# Altium PCB 十二进十二出 .PcbDoc (part 1 of 3)
Units mil, origin at the board's own origin, x right, y up, seen from the top; angles counter-clockwise.
Board outline 4818.9 x 3440.94 mil, 2 copper layers (Top Layer, Bottom Layer); 184 components, 190 nets, 626 pads, 130 vias.
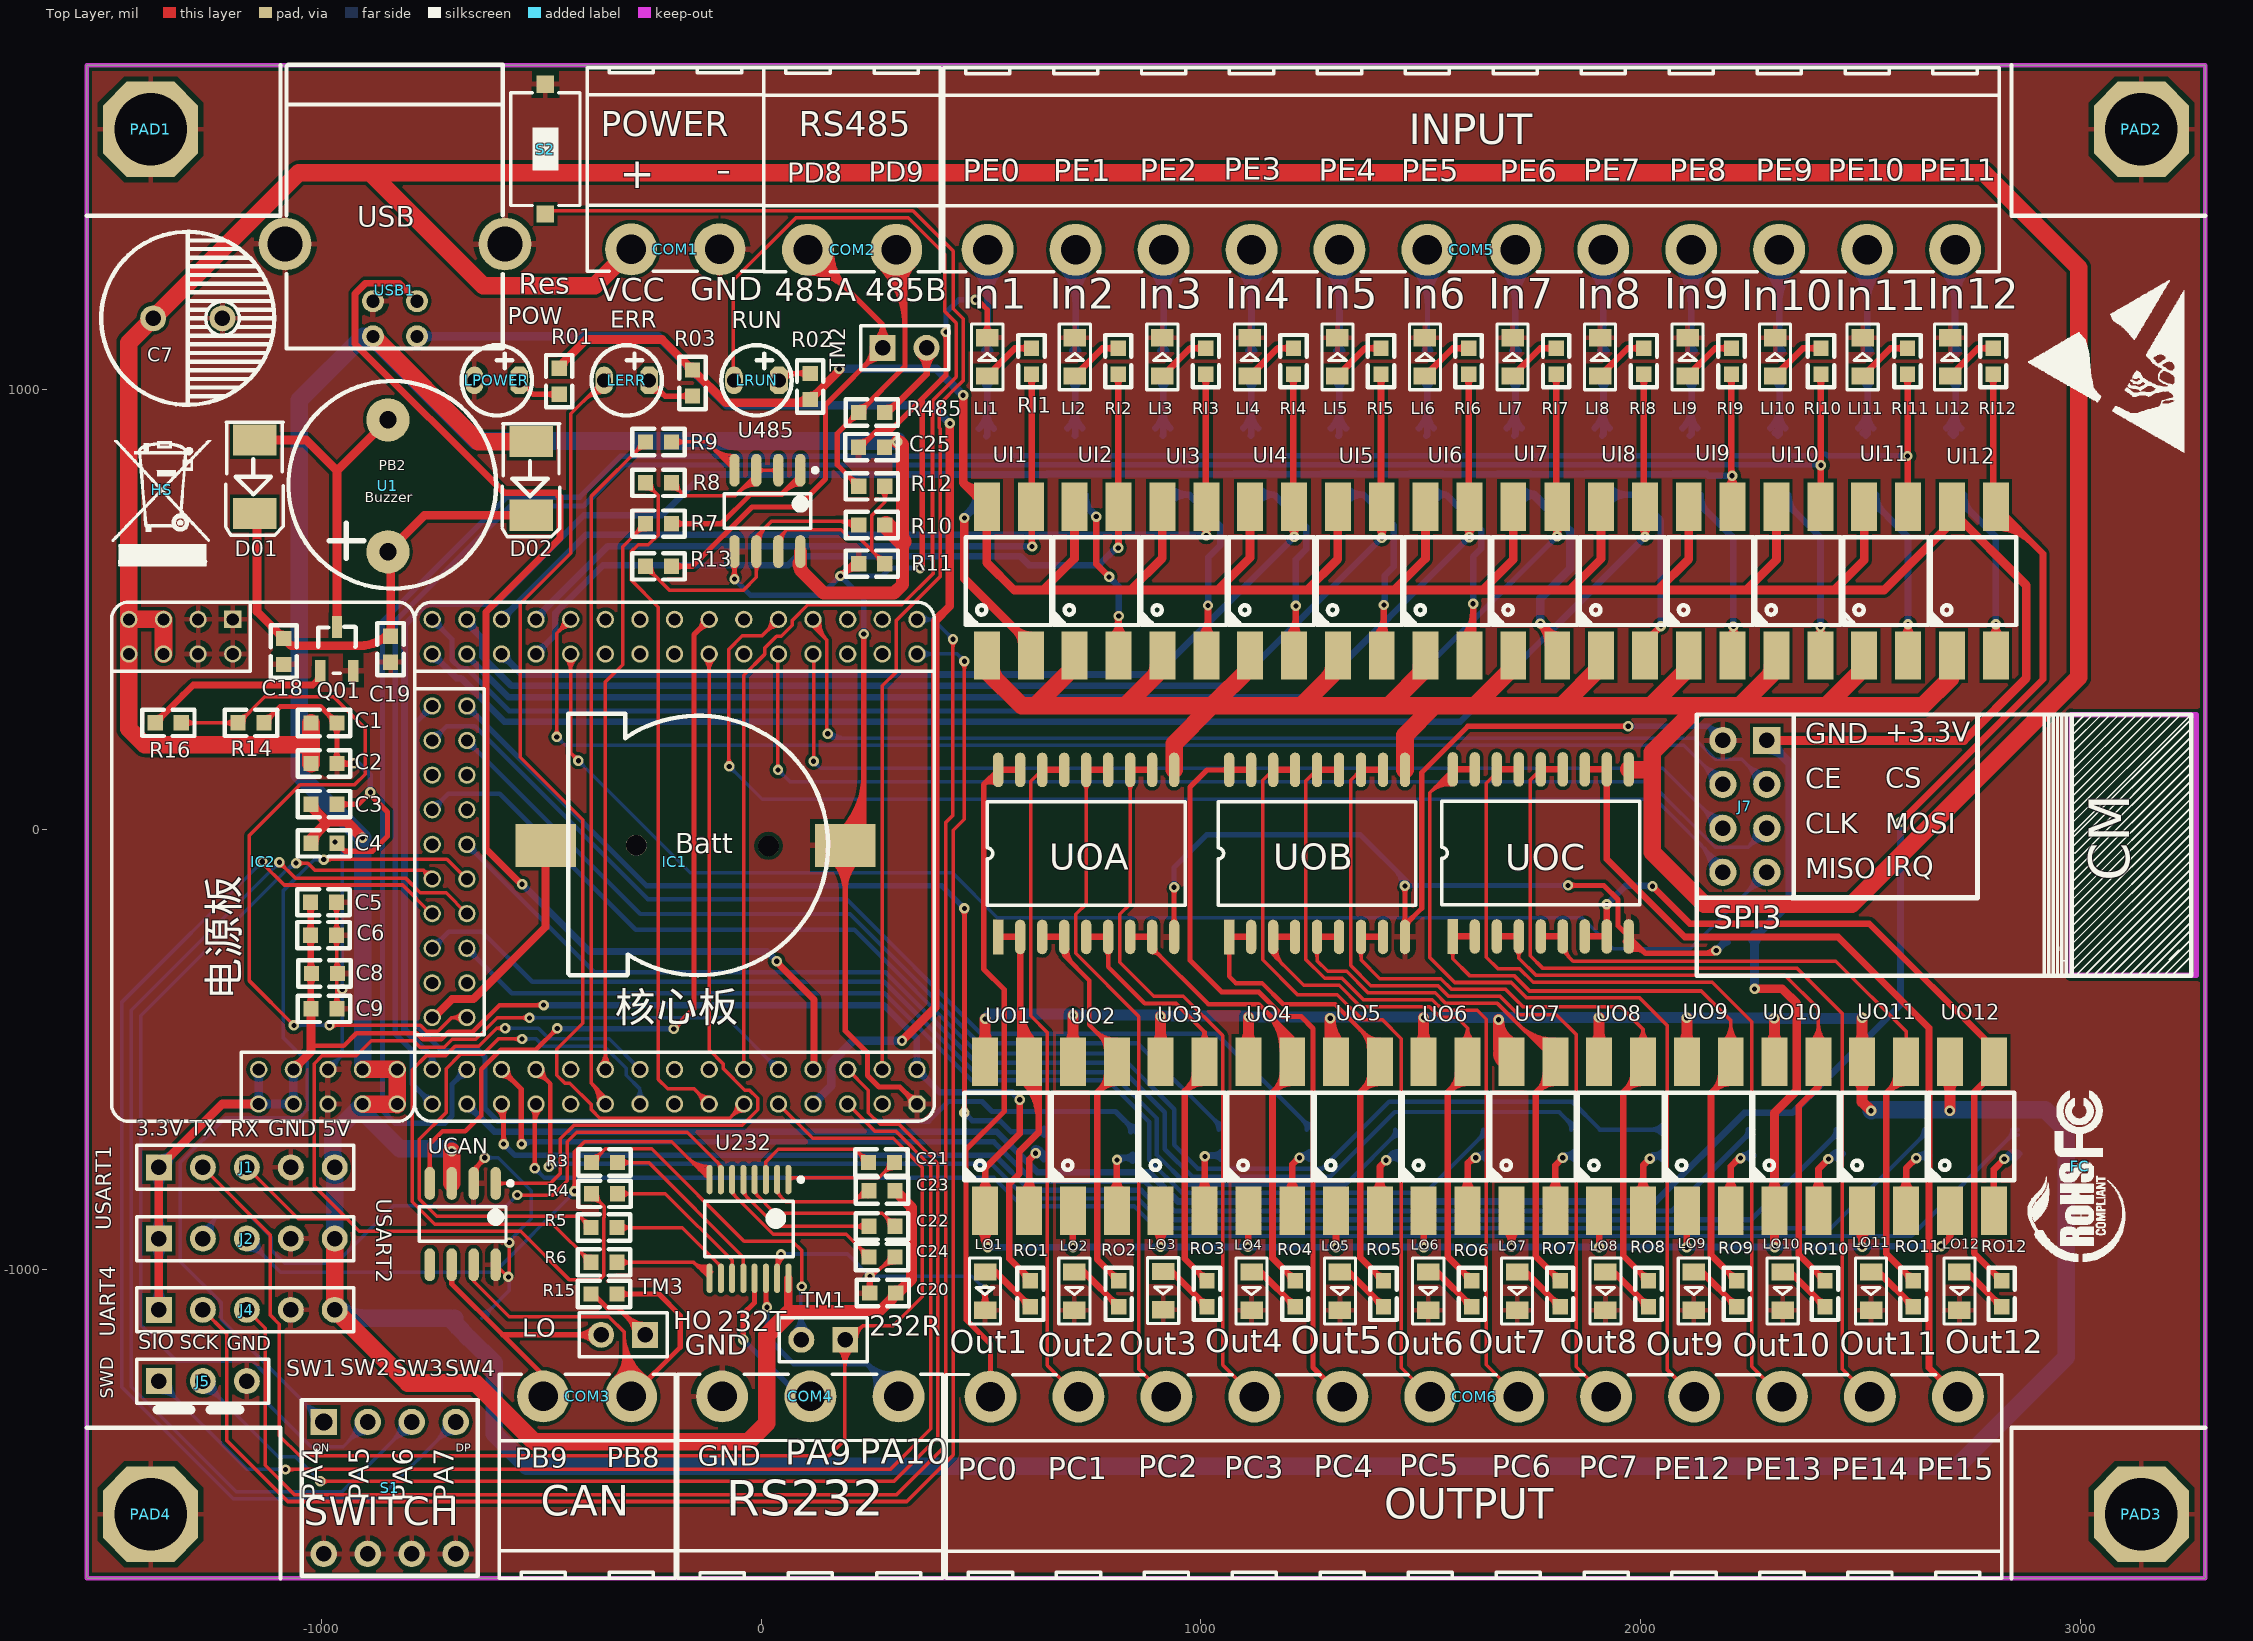
[diagram p0: Top Layer view]
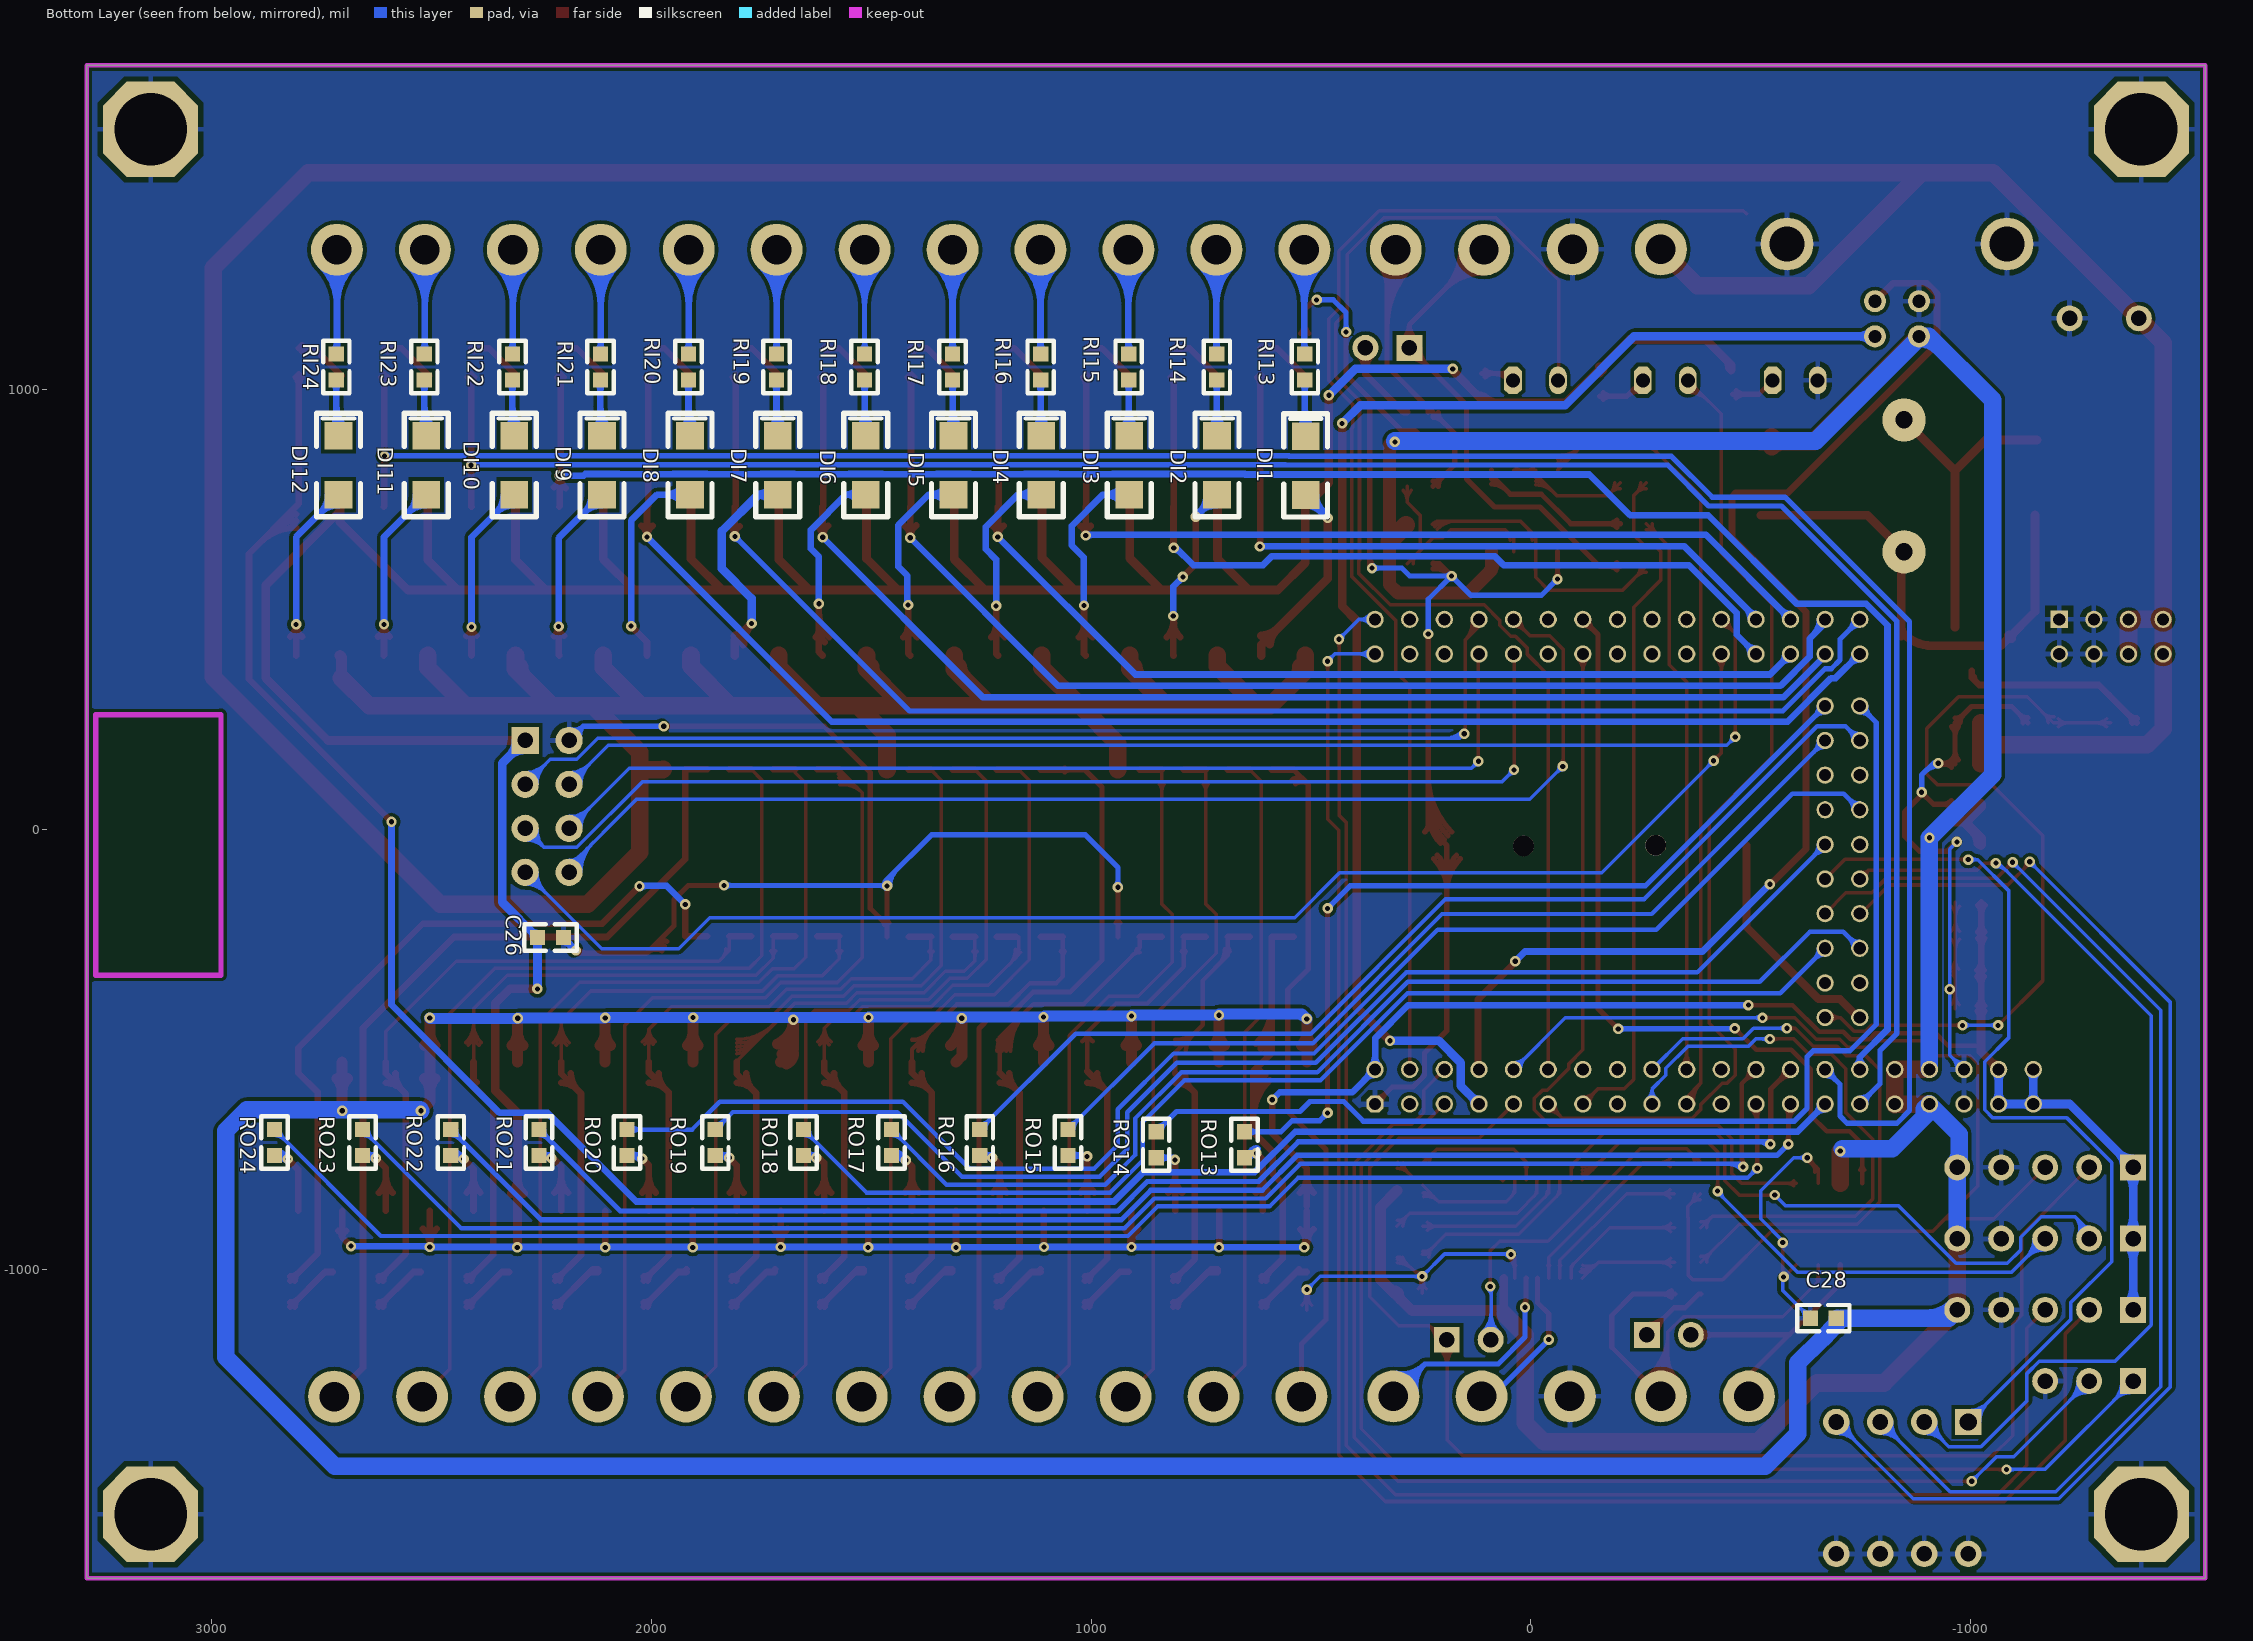
[diagram p1: Bottom Layer view, seen from below]

## Layer stack, top to bottom
Top Layer: signal copper 1.4
Dielectric: dielectric 12.6, FR-4, Dk 4.8
Bottom Layer: signal copper 1.4

## Board outline
-1534.3,-1702.68 3284.59,-1702.68 3284.59,1738.26 -1534.3,1738.26

## Design rules (kind name [scope] priority, off if disabled: settings)
Clearance [(InPadClass('All Pads')) vs InPolygon] p1: gap=8
Clearance Clearance_1 [All] p2: gap=7.87
ComponentClearance [All] p1 off: gap=10 collisioncheckmode=3 verticalgap=10 showdistances=FALSE
DiffPairsRouting [All] p1: maxlimit=12 minlimit=8 mostfreqgap=10 maxuncoupledlength=500
PlaneConnect [All] p1: planeconnectstyle=Relief reliefexpansion=0 reliefentries=4 reliefconductorwidth=11.81 reliefairgap=20
PolygonConnect PolygonConnect_1 [All vs IsComponentPad] p1: connectstyle=Relief reliefconductorwidth=11.81 reliefentries=4 polygonreliefangle="90 Angle" airgapwidth=11.81
PolygonConnect [All] p2: connectstyle=Direct reliefconductorwidth=11.81 reliefentries=4 polygonreliefangle="90 Angle" airgapwidth=11.81
RoomDefinition "公共电路 -（十二专用）" [InComponentClass('公共电路 -（十二专用） ')] p1: confinementstyle=ConfineIn formatcopy=TRUE lockcomponents=FALSE outline -1536.41,-1749.21 398.59,-1749.21 398.59,1761.79 -1536.41,1761.79
RoomDefinition 十二进十二出 [InComponentClass('十二进十二出')] p2: confinementstyle=ConfineIn formatcopy=TRUE lockcomponents=FALSE outline 3355.46,1820.94 402.7,1820.94 402.7,-1773.55 3355.46,-1773.55
RoutingVias [All] p1: holewidth=11.81 width=23.62 viastyle="Through Hole" minholewidth=11.81 minwidth=23.62 maxholewidth=11.81 maxwidth=23.62
SolderMaskExpansion [All] p1: expansion=4
Width [All] p1: maxlimit=78.74 minlimit=8 preferedwidth=50 minimp=50.000000 maximp=50.000000 favimp=50.000000
25 further rules are at their usual default settings.

## Classes and differential pairs
component class "公共电路 -（十二专用）": Batt C1 C2 C3 C4 C5 C6 C7 C8 C9 C18 C19 C20 C21 C22 C23 C24 C25 C26 C28 COM1 COM2 COM3 COM4 D01 D02 FC HS IC1 J1 J2 J4 J5 J7 LERR LPOWER LRUN PAD1 PAD2 PAD3 PAD4 Q01 R01 R02 R3 R03 R4 R5 R6 R7 R8 R9 R10 R11 R12 R13 R14 R15 R16 R485 S1 S2 TM1 TM2 TM3 U1 U232 U485 UCAN usb1
component class 十二进十二出: COM5 COM6 DI1 DI2 DI3 DI4 DI5 DI6 DI7 DI8 DI9 DI10 DI11 DI12 LI1 LI2 LI3 LI4 LI5 LI6 LI7 LI8 LI9 LI10 LI11 LI12 LO1 LO2 LO3 LO4 LO5 LO6 LO7 LO8 LO9 LO10 LO11 LO12 RI1 RI2 RI3 RI4 RI5 RI6 RI7 RI8 RI9 RI10 RI11 RI12 RI13 RI14 RI15 RI16 RI17 RI18 RI19 RI20 RI21 RI22 RI23 RI24 RO1 RO2 RO3 RO4 RO5 RO6 RO7 RO8 RO9 RO10 RO11 RO12 RO13 RO14 RO15 RO16 RO17 RO18 RO19 RO20 RO21 RO22 RO23 RO24 UI1 UI2 UI3 UI4 UI5 UI6 UI7 UI8 UI9 UI10 UI11 UI12 UO1 UO2 UO3 UO4 UO5 UO6 UO7 UO8 UO9 UO10 UO11 UO12 UOA UOB UOC

## Components (designator, comment, footprint, x,y, rotation, side; value= is the part's Value field where it differs from the comment)
Batt "电源底座" MINI-BAT -489.85,-36.21 r0 top (schematic designator BATT1)
C1 "104" 0603A -1023.91,242.36 r0 top
C2 "104" 0603A -1023.91,150.07 r0 top
C3 "104" 0603A -1023.91,57.79 r0 top
C4 "104" 0603A -1023.91,-31.07 r0 top
C5 "104" 0603A -1024.85,-165.21 r0 top
C6 "104" 0603A -1024.74,-240.21 r0 top
C7 "470UF/50V" 电解电容10mm -1382.85,1162.79 r270 top
C8 "104" 0603A -1022.85,-327.21 r0 top
C9 "104" 0603A -1023.91,-407.64 r0 top
C18 "104" 0603A -1085.85,434.79 r270 top
C19 "104" 0603A -842.85,439.79 r270 top
C20 "104" 0603A 306.15,-1054.21 r180 top
C21 "104" 0603A 303.15,-757.21 r180 top
C22 "104" 0603A 245.15,-902.21 r0 top
C23 "104" 0603A 245.15,-821.21 r0 top
C24 "104" 0603A 245.15,-972.21 r0 top
C25 "104" 0603A 221.15,869.79 r0 top
C26 "104" 0603A 2200.15,-245.21 r0 bottom
C28 "104" 0603A -635.85,-1111.21 r180 bottom locked
COM1 "POW" CON2-5.1卧#1 -94.85,1319.79 r0 top (schematic designator J1)
COM2 "RS485" CON2-5.1卧#1 307.15,1318.79 r0 top (schematic designator J4)
COM3 "CAN" CON2-5.1卧#2 -495.85,-1289.21 r180 top
COM4 "RS232" CON3-5.1卧 -89,-1289 r180 top (schematic designator RS232)
COM5 "INPUT" CON12-5.1卧上 2715.15,1318.79 r0 top
COM6 "OUTPUT" CON12-5.1卧下 1723.15,-1490.21 r0 top
D01 "RB521S" 贴片二极管 -1154.85,667.79 r270 top
D02 "RB521S" 贴片二极管 -525.85,663.79 r270 top
DI1 "4148" 1206C 512.15,760.79 r90 bottom
DI2 "4148" 1206C 713.51,761.79 r90 bottom
DI3 "4148" 1206C 913.33,761.79 r90 bottom
DI4 "4148" 1206C 1113.15,761.79 r90 bottom
DI5 "4148" 1206C 1312.96,761.79 r90 bottom
DI6 "4148" 1206C 1512.78,761.79 r90 bottom
DI7 "4148" 1206C 1712.6,761.79 r90 bottom
DI8 "4148" 1206C 1912.42,761.79 r90 bottom
DI9 "4148" 1206C 2112.24,761.79 r90 bottom
DI10 "4148" 1206C 2312.05,761.79 r90 bottom
DI11 "4148" 1206C 2511.87,761.79 r90 bottom
DI12 "4148" 1206C 2711.69,761.79 r90 bottom
FC "" fc 2999.15,-765.21 r90 top
HS "" HS -1363.85,772.79 r0 top
IC1 "Core Board" 核心板-物联网1 354.15,-624.21 r0 top
IC2 "SPOW" 电源板 -827.85,-624.21 r270 top
J1 "USART1" 2.54排针1*5 -1369.85,-668.21 r0 top
J2 "USART2" 2.54排针1*5 -1369.85,-830.21 r0 top
J4 "UART4" 2.54排针1*5 -1369.85,-992.21 r0 top
J5 "SWD" 2.54排针1*3 -1369.85,-1154.21 r0 top
J7 "NRF2401模块" NRF24L01 2187.15,202.79 r180 top
LERR "ERR" LED2.5 -305.96,1021.72 r0 top
LI1 "LED" SMDLED 514.15,1031.79 r90 top
LI2 "LED" SMDLED 713.24,1031.79 r90 top
LI3 "LED" SMDLED 912.33,1031.79 r90 top
LI4 "LED" SMDLED 1111.42,1031.79 r90 top
LI5 "LED" SMDLED 1310.51,1031.79 r90 top
LI6 "LED" SMDLED 1509.6,1031.79 r90 top
LI7 "LED" SMDLED 1708.69,1031.79 r90 top
LI8 "LED" SMDLED 1907.78,1031.79 r90 top
LI9 "LED" SMDLED 2106.87,1031.79 r90 top
LI10 "LED" SMDLED 2305.96,1031.79 r90 top
LI11 "LED" SMDLED 2505.05,1031.79 r90 top
LI12 "LED" SMDLED 2704.15,1031.79 r90 top
LO1 "LED" SMDLED 509.15,-1006.21 r270 top
LO2 "LED" SMDLED 712.15,-1006.21 r270 top
LO3 "LED" SMDLED 914.15,-1005.21 r270 top
LO4 "LED" SMDLED 1115.15,-1006.21 r270 top
LO5 "LED" SMDLED 1316.15,-1006.21 r270 top
LO6 "LED" SMDLED 1517.15,-1006.21 r270 top
LO7 "LED" SMDLED 1719.15,-1006.21 r270 top
LO8 "LED" SMDLED 1920.15,-1006.21 r270 top
LO9 "LED" SMDLED 2121.15,-1006.21 r270 top
LO10 "LED" SMDLED 2323.15,-1006.21 r270 top
LO11 "LED" SMDLED 2524.15,-1006.21 r270 top
LO12 "LED" SMDLED 2725.15,-1006.21 r270 top
LPOWER "PLED" LED2.5 -601.23,1021.72 r0 top
LRUN "RUN" LED2.5 -10.68,1021.72 r0 top
PAD1 "PAD" PAD -1388.63,1592.59 r0 top
PAD2 "PAD" PAD 3138.93,1592.59 r0 top
PAD3 "PAD" PAD 3138.93,-1557.02 r0 top
PAD4 "PAD" PAD -1388.63,-1557.02 r0 top
Q01 "9013" SOT23 -1002.85,360.79 r0 top
R01 "300R" 0603A -459.5,1049.28 r270 top
R02 "300R" 0603A 111.37,978.42 r90 top
R03 "300R" 0603A -156.35,1045.35 r270 top
R3 "33R" 0603A -385.85,-757.21 r0 top
R4 "33R" 0603A -385.85,-828.21 r0 top
R5 "33R" 0603A -386.85,-905.21 r0 top
R6 "33R" 0603A -386.85,-984.21 r0 top
R7 "33R" 0603A -262.91,695.79 r0 top
R8 "33R" 0603A -262.91,788.79 r0 top
R9 "33R" 0603A -262.91,881.79 r0 top
R10 "100K" 0603A 222.09,692.79 r0 top
R11 "100K" 0603A 281.15,604.79 r180 top
R12 "33R" 0603A 281.15,780.79 r180 top
R13 "33R" 0603A -262.91,598.79 r0 top
R14 "10K" 0603A -1130.85,242.79 r180 top
R15 "120R" 0603A -386.85,-1056.21 r0 top
R16 "1K" 0603A -1318.85,242.79 r180 top
R485 "120R" 0603A 281.15,948.79 r180 top
RI1 "270R" 0603A 615.03,1035.73 r90 top
RI2 "270R" 0603A 812.03,1035.73 r90 top
RI3 "270R" 0603A 1011.26,1035.73 r90 top
RI4 "270R" 0603A 1210.48,1035.73 r90 top
RI5 "270R" 0603A 1409.7,1035.73 r90 top
RI6 "270R" 0603A 1608.92,1035.73 r90 top
RI7 "270R" 0603A 1808.15,1035.73 r90 top
RI8 "270R" 0603A 2007.37,1035.73 r90 top
RI9 "270R" 0603A 2206.59,1035.73 r90 top
RI10 "270R" 0603A 2410.15,1035.79 r90 top
RI11 "270R" 0603A 2607.15,1035.79 r90 top
RI12 "270R" 0603A 2802.03,1035.73 r90 top
RI13 "2K4R" 0603A 513.94,1022.73 r90 bottom
RI14 "2K4R" 0603A 714.19,1022.73 r90 bottom
RI15 "2K4R" 0603A 914.44,1022.73 r90 bottom
RI16 "2K4R" 0603A 1114.69,1022.73 r90 bottom
RI17 "2K4R" 0603A 1314.94,1022.73 r90 bottom
RI18 "2K4R" 0603A 1515.19,1022.73 r90 bottom
RI19 "2K4R" 0603A 1715.44,1022.73 r90 bottom
RI20 "2K4R" 0603A 1915.69,1022.73 r90 bottom
RI21 "2K4R" 0603A 2115.94,1022.73 r90 bottom
RI22 "2K4R" 0603A 2316.19,1022.73 r90 bottom
RI23 "2K4R" 0603A 2516.44,1022.73 r90 bottom
RI24 "2K4R" 0603A 2716.69,1022.73 r90 bottom
RO1 "270R" 0603A 612.15,-1026.21 r270 top
RO2 "270R" 0603A 812.96,-1026.21 r270 top
RO3 "270R" 0603A 1013.78,-1026.21 r270 top
RO4 "270R" 0603A 1214.6,-1026.21 r270 top
RO5 "270R" 0603A 1415.42,-1026.21 r270 top
RO6 "270R" 0603A 1616.24,-1026.21 r270 top
RO7 "270R" 0603A 1817.05,-1026.21 r270 top
RO8 "270R" 0603A 2017.87,-1026.21 r270 top
RO9 "270R" 0603A 2218.69,-1026.21 r270 top
RO10 "270R" 0603A 2419.51,-1026.21 r270 top
RO11 "270R" 0603A 2620.33,-1026.21 r270 top
RO12 "270R" 0603A 2821.14,-1026.21 r270 top
RO13 "51R" 0603A 651.42,-687.21 r270 bottom
RO14 "51R" 0603A 851.96,-687.21 r270 bottom
RO15 "51R" 0603A 1052.51,-682.21 r270 bottom
RO16 "51R" 0603A 1253.06,-682.21 r270 bottom
RO17 "51R" 0603A 1454.15,-682.21 r270 bottom
RO18 "51R" 0603A 1654.15,-682.21 r270 bottom
RO19 "51R" 0603A 1854.69,-682.21 r270 bottom
RO20 "51R" 0603A 2055.24,-682.21 r270 bottom
RO21 "51R" 0603A 2255.78,-682.21 r270 bottom
RO22 "51R" 0603A 2456.33,-682.21 r270 bottom
RO23 "51R" 0603A 2656.87,-682.21 r270 bottom
RO24 "51R" 0603A 2857.42,-682.21 r270 bottom
S1 "拨码开关*4" SWITCH*4 -844.85,-1497.21 r0 top
S2 "RESRT" SW-PB2 -490.85,1547.79 r90 top
TM1 "232跳帽" 2.54排针1*2 191.15,-1260.21 r180 top
TM2 "485跳帽" 2.54排针1*2 276.15,1195.79 r0 top
TM3 "CAN跳帽" 2.54排针1*2 -264,-1249 r180 top
U1 "Buzzer" 蜂鸣器 -848.85,781.79 r270 top (schematic designator U3)
U232 "SP3232" TSSOP16 -27.85,-908.21 r270 top
U485 "SP485" SO8_L 14.15,724.79 r270 top
UCAN "TJA1050" SO8_L -678.85,-897.21 r270 top
UI1 "PC817" PC817 513.15,407.79 r90 top
UI2 "PC817" PC817 712.69,407.79 r90 top
UI3 "PC817" PC817 912.24,407.79 r90 top
UI4 "PC817" PC817 1111.78,407.79 r90 top
UI5 "PC817" PC817 1311.33,407.79 r90 top
UI6 "PC817" PC817 1510.87,407.79 r90 top
UI7 "PC817" PC817 1710.42,407.79 r90 top
UI8 "PC817" PC817 1909.96,407.79 r90 top
UI9 "PC817" PC817 2109.51,407.79 r90 top
UI10 "PC817" PC817 2309.05,407.79 r90 top
UI11 "PC817" PC817 2508.6,407.79 r90 top
UI12 "PC817" PC817 2708.15,407.79 r90 top
UO1 "PC817" PC817 509.42,-855.21 r90 top
UO2 "PC817" PC817 708.87,-855.21 r90 top
UO3 "PC817" PC817 908.33,-855.21 r90 top
UO4 "PC817" PC817 1107.78,-855.21 r90 top
UO5 "PC817" PC817 1307.24,-855.21 r90 top
UO6 "PC817" PC817 1506.69,-855.21 r90 top
UO7 "PC817" PC817 1706.15,-855.21 r90 top
UO8 "PC817" PC817 1905.6,-855.21 r90 top
UO9 "PC817" PC817 2105.05,-855.21 r90 top
UO10 "PC817" PC817 2304.51,-855.21 r90 top
UO11 "PC817" PC817 2503.96,-855.21 r90 top
UO12 "PC817" PC817 2703.42,-855.21 r90 top
UOA "ULN2803" sol18 539,-244.13 r90 top
UOB "ULN2803" sol18 1064.15,-244.13 r90 top
UOC "ULN2803" sol18 1573,-243 r90 top
USB1 "USB" USB-B3 -882.85,1121.79 r90 top

## Footprints (in the part's own frame and the unit in brackets; to place one, negate y for a bottom-side part, rotate by r counter-clockwise, add the part's x,y. Pads: shape width x height; smd on the part's side, far side on the other; paste and mask are expansions set on the pad)
2.54排针1*2 [mm]
  rect 1.5x1.5 hole 0.9: 1(0,-2.54)
  round 1.5 hole 0.9: 2(2.54,-2.54)
  silkscreen extent -1.27,-3.81 3.81,-1.27
2.54排针1*3 [mm]
  rect 1.5x1.5 hole 0.9: 1(0,-2.54)
  round 1.5 hole 0.9: 2(2.54,-2.54) 3(5.08,-2.54)
  silkscreen extent -1.27,-3.81 6.35,-1.27
2.54排针1*5 [mm]
  rect 1.5x1.5 hole 0.9: 1(0,-2.54)
  round 1.5 hole 0.9: 2(2.54,-2.54) 3(5.08,-2.54) 4(7.62,-2.54) 5(10.16,-2.54)
  silkscreen extent -1.27,-3.81 11.25,-1.27
0603A [mm]
  rect 0.88x0.88 smd: 1(0,0) 2(1.5,0)
  silkscreen extent -0.76,-0.76 2.26,0.76, body extent 0,-0.54 1.5,0.54, height 1.45
1206C [mm]
  rect 1.6x1.6 smd: A(0,0) K(3.4,0)
  silkscreen extent -1.27,-1.27 4.7,1.27, body extent 0,-1.42 3.4,1.42, height 2
CON2-5.1卧#1 [mm]
  round 3 hole 1.7: 1(0,0) 2(-5.1,0)
  silkscreen extent -7.65,-1.28 2.55,10.5
CON2-5.1卧#2 [mm]
  round 3 hole 1.7: 1(0,0) 2(-5.08,0)
  silkscreen extent -7.62,-1.28 2.53,10.5
CON3-5.1卧 [mm]
  round 3 hole 1.7: 1(0,0) 2(-5.1,0) 3(-10.2,0)
  silkscreen extent -12.75,-1.28 2.55,10.5
CON12-5.1卧上 [mm]
  round 3 hole 1.7: 1(-55.88,0) 2(-50.8,0) 3(-45.72,0) 4(-40.64,0) 5(-35.56,0) 6(-30.48,0) 7(-25.4,0) 8(-20.32,0) 9(-15.24,0) 10(-10.16,0) 11(-5.08,0) 12(0,0)
  silkscreen extent -58.42,-1.28 2.55,10.5
CON12-5.1卧下 [mm]
  round 3 hole 1.7: 1(-30.52,5.1) 2(-25.44,5.1) 3(-20.36,5.1) 4(-15.28,5.1) 5(-10.2,5.1) 6(-5.12,5.1) 7(-0.04,5.1) 8(5.04,5.1) 9(10.12,5.1) 10(15.2,5.1) 11(20.28,5.1) 12(25.36,5.1)
  silkscreen extent -33.07,-5.4 27.9,6.38
fc [mil]
  silkscreen extent -218,-103 172,118
HS [mil]
  silkscreen extent -113,-173 113,113
LED2.5 [mil]
  oct 40x63 hole 32: A(51.18,0)
  oval 40x63 hole 32: K(-51.18,0)
  silkscreen extent -80,-80 80,80
MINI-BAT [mm]
  round 1.2 hole 1.2: 0(5.226,0.017) 0(12.863,-0.02)
  rect 3.5x2.5 smd: 1(-0.01,0.007) 2(17.29,0.007)
  silkscreen extent 1.29,-7.49 16.31,7.61
NRF24L01 [mil]
  round 62 hole 35: 1(0,0) 3(0,100) 4(-100,100) 5(0,200) 6(-100,200) 7(0,300) 8(-100,300)
  rect 62x62 hole 35: 2(-100,0)
  silkscreen extent -1065,-59 59,535
PAD [mm]
  oct 5.5x5.5 hole 4.2: 1(0,0)
PC817 [mm]
  rect 2.8x1.5 smd: 1(-0.3,0) 2(-0.3,-2.54) 3(8.3,-2.54) 4(8.3,0)
  silkscreen extent 1.46,-3.72 6.53,1.22
SMDLED [mm]
  rect 1x1.3 smd: A(0,0) K(2.2,0)
  silkscreen extent -0.8,-0.9 3,0.9, body extent 0,-0.99 2.2,0.99, height 1.5
SO8_L [mm] "SOIC, 8-Leads, Body 4.9x3.9mm, Pitch 1.27mm, IPC High Density"
  oval 1.9x0.6 smd: 1(-2.35,1.905) 2(-2.35,0.635) 3(-2.35,-0.635) 4(-2.35,-1.905) 5(2.35,-1.905) 6(2.35,-0.635) 7(2.35,0.635) 8(2.35,1.905)
  silkscreen extent -2.47,-2.5 1,2.88, body extent -2,-2.5 2,2.5, height 1.75
sol18 [mm]
  rect 2x0.6 smd: 1(0,0)
  oval 2x0.6 smd: 2(0,-1.27) 3(0,-2.54) 4(0,-3.81) 5(0,-5.08) 6(0,-6.35) 7(0,-7.62) 8(0,-8.89) 9(0,-10.16) 10(9.65,-10.16) 11(9.65,-8.89) 12(9.65,-7.62) 13(9.65,-6.35) 14(9.65,-5.08) 15(9.65,-3.81) 16(9.65,-2.54) 17(9.65,-1.27) 18(9.65,0)
  silkscreen extent 1.84,-10.79 7.82,0.64
SOT23 [mm]
  rect 0.6x1.27 smd: 1(0,0) 2(1.905,0) 3(0.965,2.54)
  silkscreen extent -0.11,-0.13 2.04,2.56, body extent -0.5,0.43 2.42,2.15, height 1.5
SW-PB2 [mm]
  rect 1x1 smd: 1(-3.75,0) 2(3.75,0)
  silkscreen extent -3.25,-2 3.25,2
SWITCH*4 [mil]
  rect 60x60 hole 39.37: 1(-150,150)
  round 60 hole 35.43: 2(-50,150) 3(50,150) 4(150,150) 5(-150,-150) 6(-50,-150) 7(50,-150) 8(150,-150)
  silkscreen extent -200,-200 200,200
TSSOP16 [mm] "TSOP, 16-Leads, Body 5x4.4mm, Pitch 0.65mm, IPC Medium Density"
  oval 1.7x0.35 smd: 1(-2.85,2.275) 2(-2.85,1.625) 3(-2.85,0.975) 4(-2.85,0.325) 5(-2.85,-0.325) 6(-2.85,-0.975) 7(-2.85,-1.625) 8(-2.85,-2.275) 9(2.85,-2.275) 10(2.85,-1.625) 11(2.85,-0.975) 12(2.85,-0.325) 13(2.85,0.325) 14(2.85,0.975) 15(2.85,1.625) 16(2.85,2.275)
  silkscreen extent -2.97,-2.55 1.6,3.13, body extent -2.25,-2.55 2.25,2.55, height 1.1
USB-B3 [mil]
  round 50 hole 30: 1(0,0) 2(0,-100) 3(80,-100) 4(80,0)
  round 120 hole 80: 5(210,200) 6(210,-300)
  silkscreen extent -28,-295 618,197
核心板-物联网1 [mm]
  oct 1x1 hole 0.7: 1(0,0)
  round 1 hole 0.7: 2(0,2) 3(-2,0) 4(-2,2) 5(-4,0) 6(-4,2) 7(-6,0) 8(-6,2) 9(-8,0) 10(-8,2) 11(-10,0) 12(-10,2) 13(-12,0) 14(-12,2) 15(-14,0) 16(-14,2) 17(-16,0) 18(-16,2) 19(-18,0) 20(-18,2) 21(-20,0) 22(-20,2) 23(-22,0) 24(-22,2) 25(-24,0) 26(-24,2) 27(-26,0) 28(-26,2) 29(-28,0) 30(-28,2) 31(-26,5) 32(-28,5) 33(-26,7) 34(-28,7) 35(-26,9) 36(-28,9) 37(-26,11) 38(-28,11) 39(-26,13) 40(-28,13) 41(-26,15) 42(-28,15) 43(-26,17) 44(-28,17) 45(-26,19) 46(-28,19) 47(-26,21) 48(-28,21) 49(-26,23) 50(-28,23) 51(-28,26) 52(-28,28) 53(-26,26) 54(-26,28) 55(-24,26) 56(-24,28) 57(-22,26) 58(-22,28) 59(-20,26) 60(-20,28) 61(-18,26) 62(-18,28) 63(-16,26) 64(-16,28) 65(-14,26) 66(-14,28) 67(-12,26) 68(-12,28) 69(-10,26) 70(-10,28) 71(-8,26) 72(-8,28) 73(-6,26) 74(-6,28) 75(-4,26) 76(-4,28) 77(-2,26) 78(-2,28) 79(0,26) 80(0,28)
  silkscreen extent -29,-1 1,29
电源板 [mm]
  round 1 hole 0.7: 1(-2,0) 1(-2,-2) 1(0,0) 1(0,-2) 2(-2,-4) 2(0,-4) 3(-2,-6) 3(-2,-8) 3(0,-6) 3(0,-8) 4(-28,-11.5) 4(-26,-11.5) 4(-26,-9.5) 6(-28,-15.5) 6(-28,-13.5) 6(-26,-15.5) 6(-26,-13.5)
  rect 1x1 hole 0.7: 5(-28,-9.5)
  silkscreen extent -29,-16.5 1,1
电解电容10mm [mm]
  round 1.5 hole 0.9: 1(0,0) 2(0,4)
  silkscreen extent -5,-3 5,7
蜂鸣器 [mm]
  round 2.5 hole 1: 1(3.81,0) 2(-3.81,0)
  silkscreen extent -6.06,-5.75 5.94,6.25
贴片二极管 [mm]
  rect 1.8x2.5 smd: A(-5.55,0.075) K(-1.3,0.075)
  silkscreen extent -6.58,-1.61 -0.05,1.73

## Part data
Batt: library part Battery, "XH414H"
C1 C2 C3 C4 C5 C6 C8 C9 C18 C19 C20 C21 C22 C23 C24 C25 C26 C28: library part CAP, "Capacitor"
C7: library part "CAPACITOR POL", "Capacitor"
COM1 COM2 COM3: library part CON2
COM4: library part CON3
COM5 COM6: library part CON12
FC HS: library part PAD
IC1: library part 物联网核心板
J1 J2 J4: library part "Header 5", "Header, 4-Pin"
J5: library part "Header 3", "Header, 4-Pin"
LERR LPOWER LRUN: library part LED
Q01: library part NPN
R01 R02 R03 R3 R4 R5 R6 R7 R8 R9 R10 R11 R12 R13 R14 R15 R16 R485: library part RES2
RI1 RI2 RI3 RI4 RI5 RI6 RI7 RI8 RI9 RI10 RI11 RI12 RI13 RI14 RI15 RI16 RI17 RI18 RI19 RI20 RI21 RI22 RI23 RI24 RO1 RO2 RO3 RO4 RO5 RO6 RO7 RO8 RO9 RO10 RO11 RO12 RO13 RO14 RO15 RO16 RO17 RO18 RO19 RO20 RO21 RO22 RO23 RO24: library part Res2, "Resistor"
S2: library part SW-PB
TM1 TM2 TM3: library part "Header 2", "Header, 2-Pin"
U232: library part SP3232EEA
UI1 UI2 UI3 UI4 UI5 UI6 UI7 UI8 UI9 UI10 UI11 UI12 UO1 UO2 UO3 UO4 UO5 UO6 UO7 UO8 UO9 UO10 UO11 UO12: library part TLP521-1, "Single NPN PhotoTransistor OptoCoupler."
USB1: library part "HEADER 3X2"

## Via types
v1: diameter 23.62, hole 11.81, Top Layer to Bottom Layer, 130 vias

## Nets (pads, with @x,y where several pads share a name; then routed paths per layer and width w, separated by ;. In a path a pad name is that pad's centre, name@x,y a point inside that pad or via, vN(x,y) a via of type N, cw(c..) or ccw(c..) an arc to the next point about the centre after c; other vN are vias at no path point)
485A: COM2.2 R13.2 TM2.1 | length 1761.3
  Top Layer w11.81: R13.2@-203.85,598.79 -156.12,598.79 -21.12,733.79 82.4,733.79 146.25,797.64 146.25,965.89 TM2.1@276.15,1095.79 276.15,1149 ; R13.2@-195.78,590.71 cw(c-176.29,571.22) -176.29,598.79 cw(c-176.29,626.35) R13.2@-195.78,606.86 ; COM2.2@106.36,1265.64 cw(c106.36,1137.32) 197.09,1228.06 cw(c287.82,1318.79) COM2.2@159.51,1318.79 ; COM2.2@106.36,1277.45 cw(c106.36,1177.65) 176.93,1248.22 cw(c247.5,1318.79) COM2.2@147.7,1318.79 ; COM2.2@106.36,1289.26 cw(c106.36,1217.97) 156.76,1268.38 cw(c207.17,1318.79) COM2.2@135.88,1318.79 ; COM2.2@106.36,1318.79 276.15,1149 ; TM2.1@252.52,1095.79 cw(c195.5,1095.79) 235.82,1055.46 cw(c276.15,1015.14) TM2.1@276.15,1072.17 ; TM2.1@260.3,1113.31 ccw(c228.03,1149) 276.15,1149 ; TM2.1@291.99,1113.31 cw(c324.26,1149) 276.15,1149
485B: COM2.1 R12.2 R485.2 | length 1352.7
  Top Layer w11.81: 200.99,928.63 cw(c222.09,907.53) R485.2@222.09,937.37 ; 203.27,930.91 ccw(c185.39,948.79) R485.2@210.67,948.79 ; R12.2@210.67,780.79 ccw(c183.11,780.79) 202.6,800.28 ccw(c222.09,819.77) R12.2@222.09,792.2 ; R12.2@222.09,780.79 173.15,829.73 173.15,900.79 213.15,940.79 R485.2@222.09,940.79 ; R485.2@222.09,948.79 327.15,1053.84 327.15,1298.79 COM2.1@307.14,1318.79 ; R485.2@222.09,960.2 ccw(c222.09,987.77) 241.58,968.28 ccw(c261.07,948.79) R485.2@233.51,948.79 ; COM2.1@269.56,1281.21 cw(c130.54,1142.19) 327.15,1142.19 ; COM2.1@277.91,1289.56 cw(c159.06,1170.7) 327.15,1170.7 ; COM2.1@286.27,1297.91 cw(c187.57,1199.22) 327.15,1199.22 ; COM2.1@294.62,1306.26 cw(c216.09,1227.73) 327.15,1227.73 ; COM2.1@302.97,1314.61 cw(c244.6,1256.24) 327.15,1256.24 ; 327.15,1238.76 cw(c387.17,1238.76) COM2.1@344.73,1281.21
+3.3V: C5.1 C6.1 C8.1 C9.1 C26.2 IC1.2 IC2.3 J1.1 J2.1 J4.1 J7.2 R01.1 R02.1 R03.1 UI1.4 UI2.4 UI3.4 UI4.4 UI5.4 UI6.4 UI7.4 UI8.4 UI9.4 UI10.4 UI11.4 UI12.4 UO1.1 UO2.1 UO3.1 UO4.1 UO5.1 UO6.1 UO7.1 UO8.1 UO9.1 UO10.1 UO11.1 UO12.1 | length 17567.9
  Top Layer w10: -1023.91,-493.21 -1022.59,-491.9 -949.63,-491.9 -921.07,-463.34 -783.56,-463.34 -770.11,-476.8 -727.74,-476.8 -710.87,-459.92 -655.99,-459.92 -595.28,-399.21 v1(-494.85,-399.21) ; v1@-499.67,-404.03 ccw(c-511.3,-415.66) -511.3,-399.21 ccw(c-511.3,-382.77) v1@-499.67,-394.4
  Top Layer w15: C5.1@-1031.8,-172.16 cw(c-1048.57,-188.93) -1024.85,-188.93 cw(c-1001.14,-188.93) C5.1@-1017.91,-172.16 ; C6.1@-1031.68,-247.16 cw(c-1048.17,-263.65) -1024.85,-263.65 ; C6.1@-1031.68,-233.27 ccw(c-1048.17,-216.78) -1024.85,-216.78 ; C9.1@-1030.86,-400.7 ccw(c-1045.34,-386.21) -1024.85,-386.21 ; C8.1@-1029.8,-334.16 cw(c-1041.74,-346.1) -1024.85,-346.1 ; C8.1@-1029.8,-320.27 ccw(c-1041.74,-308.33) -1024.85,-308.33 ; -1024.85,-381.65 ccw(c-997.91,-381.65) C9.1@-1016.96,-400.7 ; -1024.85,-355.76 cw(c-994.31,-355.76) C8.1@-1015.91,-334.16 ; -1024.85,-298.67 ccw(c-994.31,-298.67) C8.1@-1015.91,-320.27 ; -1024.85,-264.21 cw(c-1000.74,-264.21) C6.1@-1017.79,-247.16 ; -1024.85,-216.22 ccw(c-1000.74,-216.22) C6.1@-1017.79,-233.27 ; C5.1@-1024.85,-165.21 -1024.85,-406.7 C9.1@-1023.91,-407.64 ; UO1.1@493.84,-825.86 ccw(c456.24,-788.25) 509.42,-788.25 ccw(c562.6,-788.25) UO1.1@524.99,-825.86 ; UO1.1@494.12,-908.46 cw(c459.37,-944.48) v1@509.42,-944.48 ; 506.01,-931.77 ccw(c529.42,-925.49) v1@517.3,-946.48 ; 509.42,-925.98 ccw(c539.38,-925.98) v1@518.19,-947.16 ; UO1.1@509.42,-867.02 v1@509.42,-944.49 ; UO1.1@509.42,-856.21 509.42,-769.94 588.15,-691.21 v1(588.15,-614.21) ; 512.98,-931.19 ccw(c527.81,-935.17) v1@517.92,-946.91 ; v1(515.15,-950.21) v1@509.42,-944.49 ; UO1.1@524.71,-908.46 ccw(c559.47,-944.48) v1@509.42,-944.48 ; UO2.1@708.87,-867.02 708.87,-949.94 v1(709.15,-950.21) ; UO3.1@892.75,-908.19 cw(c855.15,-945.79) 908.33,-945.79 cw(c961.51,-945.79) UO3.1@923.9,-908.19 ; v1(908.15,-949.21) 908.33,-949.03 UO3.1@908.33,-867.02 ; 910.6,-937.32 ccw(c922.99,-940.64) v1@911.88,-947.06 ; v1@1104.1,-946.16 ccw(c1095.2,-937.27) 1107.78,-937.27 ; v1(1107.15,-949.21) 1107.78,-949.85 UO4.1@1107.78,-867.02 ; v1(1307.15,-950.21) 1307.24,-950.12 UO5.1@1307.24,-867.02 ; UO6.1@1506.69,-867.02 1506.69,-949.76 v1(1507.15,-950.21) ; UO7.1@1690.57,-908.19 cw(c1652.97,-945.79) 1706.15,-945.79 cw(c1759.32,-945.79) UO7.1@1721.72,-908.19 ; v1(1706.15,-949.21) UO7.1@1706.15,-867.02 ; UO8.1@1905.6,-867.02 1905.6,-949.67 v1(1906.15,-950.21) ; UO9.1@2105.05,-867.02 2105.05,-950.12 v1(2105.15,-950.21) ; UO11.1@2488.39,-908.19 cw(c2450.78,-945.79) 2503.96,-945.79 cw(c2557.14,-945.79) UO11.1@2519.54,-908.19 ; UO11.1@2503.96,-867.02 2503.96,-949.03 v1(2504.15,-949.21) ; v1(2683.15,-947.21) 2703.42,-926.94 ; UO12.1@2694.24,-912.64 cw(c2687.69,-926.94) 2703.42,-926.94 ; UO12.1@2703.42,-867.02 2703.42,-926.94 ; UO12.1@2712.59,-912.64 ccw(c2719.15,-926.94) 2703.42,-926.94
  Top Layer w19.68: J4.1@-1369.85,-1092.21 J2.1@-1369.85,-930.21 J1.1@-1369.85,-768.21 -1225.85,-624.21 IC2.3@-1142.81,-624.21 ; IC2.3@-1149.77,-631.17 ccw(c-1166.58,-647.97) -1166.58,-624.21 ccw(c-1166.58,-600.45) IC2.3@-1149.77,-617.25 ; IC2.3@-1064.07,-545.47 -1023.91,-505.31 -1023.91,-493.21 C9.1@-1023.91,-407.64 ; IC2.3@-1064.07,-535.63 ccw(c-1064.07,-511.87) -1047.27,-528.67 ccw(c-1030.47,-545.47) IC2.3@-1054.23,-545.47 ; C9.1@-1029.2,-412.93 cw(c-1041.97,-425.7) -1023.91,-425.7 cw(c-1005.85,-425.7) C9.1@-1018.62,-412.93 ; R01.1@-455.56,1045.35 -455.56,1057.16 -397.93,1114.79 -225.79,1114.79 R03.1@-156.35,1045.35 -155.7,1045.35 -80.9,970.54 103.49,970.54 R02.1@111.37,978.42 112.01,978.42 179.38,1045.79 179.38,1046.02 v1(177.62,1047.79) ; R01.1@-452.02,1049.28 cw(c-424.46,1049.28) -443.95,1068.77 ; R03.1@-163.83,1045.35 ccw(c-181.89,1045.35) -169.12,1058.12 ccw(c-156.35,1070.89) R03.1@-156.35,1052.83 ; R03.1@-156.35,1037.87 cw(c-156.35,1018.25) R03.1@-142.48,1032.12 ; 74.3,970.54 ccw(c74.3,1015.49) R02.1@106.08,983.71 ; R02.1@111.37,985.9 ccw(c111.37,1005.52) R02.1@125.24,991.64 ; v1(459.15,987.79) 459.15,788.56 ; 480.62,767.09 ccw(c502.23,788.71) UI1.4@513.15,760.15 ; UI1.4@506.12,778.54 cw(c490.36,819.77) 459.15,788.56 ; UI2.4@712.69,734.56 712.69,616.33 641.15,544.79 ; UI3.4@912.24,734.56 912.24,616.88 840.15,544.79 ; UI4.4@1111.78,734.56 1111.78,618.42 1038.15,544.79 ; UI5.4@1311.33,734.56 1311.33,614.97 1241.15,544.79 ; UI6.4@1510.87,734.56 1510.87,616.51 1439.15,544.79 ; UI7.4@1710.42,734.56 1710.42,614.06 1641.15,544.79 ; UI8.4@1909.96,734.56 1909.96,615.61 1839.15,544.79 ; UI9.4@2109.51,734.56 2109.51,615.15 2039.15,544.79 ; v1(2259.2,-362.27) 2322.2,-362.27 2355.15,-395.21 2355.15,-593.21 2304.51,-643.85 UO10.1@2304.51,-867.02 2304.51,-949.58 v1(2305.15,-950.21) ; J7.2@2287.15,202.79 2735.79,202.79 2877.15,344.15 2877.15,555.86 UI12.4@2708.15,724.86 ; UO10.1@2290.59,-827.51 ccw(c2256.99,-793.91) 2304.51,-793.91 ccw(c2352.03,-793.91) UO10.1@2318.43,-827.51 ; UI10.4@2309.05,734.56 2309.05,613.7 2240.15,544.79 ; UI11.4@2508.6,734.56 2508.6,613.24 2440.15,544.79 ; UI12.4@2708.15,734.56 UI12.4@2708.15,724.86 ; 459.15,788.56 UI1.4@513.15,734.56 513.15,606.79 575.15,544.79 641.15,544.79 ; 641.15,544.79 840.15,544.79 ; 840.15,544.79 1038.15,544.79 ; 1038.15,544.79 1241.15,544.79 ; 1241.15,544.79 1439.15,544.79 ; 1439.15,544.79 1641.15,544.79 ; 1641.15,544.79 1839.15,544.79 ; 1839.15,544.79 2039.15,544.79 ; 2039.15,544.79 2240.15,544.79 ; 2240.15,544.79 2440.15,544.79 ; 2440.15,544.79 2554.15,544.79 2708.15,698.79 UI12.4@2708.15,724.86
  Bottom Layer w15: v1(-494.85,-399.21) 278.5,-399.21 354.15,-474.86 IC1.2@354.15,-545.47 405.83,-597.15 571.09,-597.15 v1(588.15,-614.21) ; IC1.2@345.53,-536.86 ccw(c324.73,-516.06) 354.15,-516.06 ccw(c383.56,-516.06) IC1.2@362.76,-536.86 ; IC1.2@354.15,-557.66 cw(c354.15,-587.07) 374.95,-566.27 cw(c395.75,-545.47) IC1.2@366.33,-545.47 ; v1(515.15,-950.21) v1(709.15,-950.21) 709.15,-949.21 v1(908.15,-949.21) v1(1107.15,-949.21) 1108.15,-950.21 v1(1307.15,-950.21) 1307.15,-949.21 v1@1507.15,-949.21 ; v1@712.19,-953.26 cw(c721.97,-963.03) 721.97,-949.21 ; v1@1110.19,-946.16 ccw(c1119.97,-936.39) 1119.97,-950.21 ; v1@1310.19,-953.26 cw(c1319.97,-963.03) 1319.97,-949.21 ; 1494.32,-949.21 cw(c1494.32,-963.03) v1@1504.1,-953.26 ; v1(1507.15,-950.21) v1@1507.15,-949.21 ; v1@1510.19,-953.26 cw(c1519.97,-963.03) 1519.97,-949.21 ; 1893.32,-949.21 cw(c1893.32,-963.03) v1@1903.1,-953.26 ; v1@1909.19,-953.26 cw(c1918.97,-963.03) 1918.97,-949.21 ; 2092.32,-949.21 cw(c2092.32,-963.03) v1@2102.1,-953.26 ; v1(2105.15,-950.21) v1@2105.15,-949.21 ; v1@2108.19,-953.26 cw(c2117.97,-963.03) 2117.97,-949.21 ; 2292.32,-949.21 cw(c2292.32,-963.03) v1@2302.1,-953.26 ; v1@2308.19,-953.26 cw(c2317.97,-963.03) 2317.97,-949.21 ; v1@2507.19,-952.26 cw(c2519.38,-964.45) 2519.38,-947.21 ; v1(2683.15,-947.21) 2504.15,-947.21 v1(2504.15,-949.21) 2305.15,-949.21 v1@2105.15,-949.21 ; v1@1507.15,-949.21 v1(1706.15,-949.21) 1905.15,-949.21 v1(1906.15,-950.21) 1906.15,-949.21 v1@2105.15,-949.21
  Bottom Layer w19.68: J4.1@-1383.77,-1078.29 ccw(c-1417.38,-1044.69) -1369.85,-1044.69 ccw(c-1322.33,-1044.69) J4.1@-1355.93,-1078.29 ; J2.1@-1383.77,-944.13 cw(c-1417.38,-977.74) -1369.85,-977.74 cw(c-1322.33,-977.74) J2.1@-1355.93,-944.13 ; J2.1@-1383.77,-916.29 ccw(c-1417.38,-882.69) -1369.85,-882.69 ccw(c-1322.33,-882.69) J2.1@-1355.93,-916.29 ; J1.1@-1383.77,-782.13 cw(c-1417.38,-815.74) -1369.85,-815.74 cw(c-1322.33,-815.74) J1.1@-1355.93,-782.13 ; J4.1@-1369.85,-1092.21 J2.1@-1369.85,-930.21 J1.1@-1369.85,-768.21 -1225.85,-624.21 IC2.3@-1142.81,-624.21 ; J1.1@-1369.85,-748.53 ccw(c-1369.85,-701) -1336.25,-734.61 ccw(c-1302.65,-768.21) J1.1@-1350.17,-768.21 ; IC2.3@-1149.77,-631.17 ccw(c-1166.58,-647.97) -1166.58,-624.21 ccw(c-1166.58,-600.45) -1149.77,-617.25 ccw(c-1166.58,-600.45) -1142.81,-600.45 ccw(c-1119.05,-600.45) -1135.86,-617.25 ccw(c-1119.05,-600.45) -1119.05,-624.21 ccw(c-1119.05,-647.97) IC2.3@-1135.86,-631.17 ; IC2.3@-1149.77,-552.43 cw(c-1166.58,-569.23) -1142.81,-569.23 cw(c-1119.05,-569.23) IC2.3@-1135.86,-552.43 ; IC2.3@-1141.55,-544.21 IC2.3@-1142.81,-545.47 IC2.3@-1142.81,-624.21 ; IC2.3@-1071.03,-631.17 ccw(c-1087.84,-647.97) -1087.84,-624.21 ccw(c-1087.84,-600.45) -1071.03,-617.25 ccw(c-1087.84,-600.45) -1064.07,-600.45 ccw(c-1040.31,-600.45) IC2.3@-1057.12,-617.25 ; IC2.3@-1071.03,-552.43 cw(c-1087.84,-569.23) -1064.07,-569.23 cw(c-1040.31,-569.23) IC2.3@-1057.12,-552.43 ; IC2.3@-1064.07,-545.47 IC2.3@-1064.07,-624.21 IC2.3@-1142.81,-624.21 ; IC2.3@-1064.07,-544.21 IC2.3@-1063.85,-544.21 ; v1(177.62,1047.79) 399.15,1047.79 v1(459.15,987.79) ; C26.2@2253.91,-250.5 cw(c2241.14,-263.27) 2259.2,-263.27 cw(c2277.26,-263.27) C26.2@2264.49,-250.5 ; v1(2259.2,-362.27) C26.2@2259.2,-245.21 2339.15,-165.27 2339.15,150.79 J7.2@2287.15,202.79 ; C26.2@2259.2,-237.73 ccw(c2259.2,-219.67) 2271.97,-232.44 ccw(c2284.74,-245.21) C26.2@2266.68,-245.21 ; J7.2@2287.15,181.63 cw(c2287.15,130.55) 2323.26,166.67 cw(c2359.38,202.79) J7.2@2308.3,202.79 ; v1(2305.15,-950.21) v1@2305.15,-949.21
+5V: C3.1 C4.1 C20.1 C23.2 C25.2 C28.2 D02.A IC2.1 J1.5 J2.5 J4.5 R10.2 U232.16 U485.8 UCAN.3 UO1.4 UO2.4 UO3.4 UO4.4 UO5.4 UO6.4 UO7.4 UO8.4 UO9.4 UO10.4 UO11.4 UO12.4 USB1.1 | length 17628.7
  Top Layer w20: 61.71,-1101.21 U232.16@61.71,-1020.42
  Top Layer w23.62: C4.1@-1023.91,-34.5 C4.1@-1023.91,-31.07 -1023.91,-20.27 -984.85,18.79 -944.07,18.79 v1(-906.85,-18.43) ; C3.1@-1023.91,57.79 -1023.91,52.64 -988.05,16.79 ; C4.1@-1018.4,-31.07 cw(c-979.01,-31.07) -1006.86,-3.22 ; C3.1@-1018.4,57.79 ccw(c-992.67,57.79) -1010.86,39.6
  Top Layer w25: 61.71,-1101.21 68.71,-1094.21 270.65,-1094.21 341.9,-1022.96 341.9,-946.45 341.77,-946.32 341.77,-928.1 341.9,-927.97 341.9,-858.91 C23.2@304.2,-821.21 ; C20.1@294.73,-1070.13 ccw(c278.81,-1054.21) C20.1@301.32,-1054.21 ; C20.1@306.15,-1049.39 ccw(c306.15,-1026.87) C20.1@322.07,-1042.79 ; UO1.4@497.38,-490.81 ccw(c468.31,-461.74) 509.42,-461.74 ccw(c550.53,-461.74) UO1.4@521.46,-490.81 ; UO1.4@509.42,-528.44 v1(509.42,-430.49) ; UO2.4@696.83,-490.81 ccw(c667.77,-461.74) 708.87,-461.74 ccw(c749.98,-461.74) UO2.4@720.91,-490.81 ; UO2.4@708.87,-528.44 708.87,-421.94 v1(709.15,-422.21) ; UO3.4@896.29,-490.81 ccw(c867.22,-461.74) 908.33,-461.74 ccw(c949.44,-461.74) UO3.4@920.37,-490.81 ; v1(908.15,-424.21) 908.33,-424.03 UO3.4@908.33,-528.44 ; UO4.4@1095.74,-490.81 ccw(c1066.67,-461.74) 1107.78,-461.74 ccw(c1148.89,-461.74) UO4.4@1119.82,-490.81 ; UO4.4@1107.78,-528.44 1107.78,-426.85 1108.15,-426.49 v1(1108.15,-426.21) ; v1@1294.15,-430.14 ccw(c1379.95,-430.14) UO5.4@1319.28,-490.81 ; v1(1294.15,-429.21) 1294.15,-515.35 UO5.4@1307.24,-528.44 ; UO6.4@1494.65,-490.81 ccw(c1465.58,-461.74) 1506.69,-461.74 ccw(c1547.8,-461.74) UO6.4@1518.73,-490.81 ; v1(1506.15,-427.21) 1506.69,-427.76 UO6.4@1506.69,-528.44 ; UO7.4@1676.97,-508.64 ccw(c1703.62,-508.64) UO7.4@1692.97,-533.07 ; 1676.97,-470.47 ccw(c1720.26,-470.47) UO7.4@1702.96,-510.16 ; UO7.4@1706.15,-528.44 1676.97,-499.26 v1(1676.97,-432.29) ccw(c1736.91,-432.3) UO7.4@1712.95,-487.24 ; UO8.4@1893.56,-490.81 ccw(c1864.49,-461.74) 1905.6,-461.74 ccw(c1946.71,-461.74) UO8.4@1917.64,-490.81 ; v1(1905.15,-427.21) 1906.15,-428.21 1905.6,-428.76 UO8.4@1905.6,-528.44 ; UO9.4@2093.01,-490.81 ccw(c2063.95,-461.74) 2105.05,-461.74 ccw(c2146.16,-461.74) UO9.4@2117.1,-490.81 ; UO9.4@2105.05,-528.44 2105.05,-428.3 v1(2105.15,-428.21) ; UO10.4@2292.47,-490.81 ccw(c2263.4,-461.74) 2304.51,-461.74 ccw(c2345.62,-461.74) UO10.4@2316.55,-490.81 ; v1(2304.15,-429.21) 2304.51,-429.58 UO10.4@2304.51,-528.44 ; UO11.4@2491.92,-566.07 cw(c2462.86,-595.14) 2503.96,-595.14 cw(c2545.07,-595.14) UO11.4@2516,-566.07 ; UO11.4@2491.92,-490.81 ccw(c2462.86,-461.74) 2503.96,-461.74 ccw(c2545.07,-461.74) UO11.4@2516,-490.81 ; v1(2504.15,-428.21) 2503.96,-428.39 UO11.4@2503.96,-528.44 2503.96,-619.03 v1(2524.15,-639.21) ; UO12.4@2691.38,-566.07 cw(c2662.31,-595.14) 2703.42,-595.14 cw(c2744.53,-595.14) UO12.4@2715.46,-566.07 ; v1(2703.15,-639.21) 2703.42,-638.94 UO12.4@2703.42,-528.44
  Top Layer w30: U485.8@85.96,606.68 ccw(c116.41,606.68) 94.88,585.15 ; U485.8@89.15,632.27 89.15,590.88 142.15,537.88 301.96,537.88 321.34,557.25 321.34,655.27 321.34,875.98 315.59,881.74 v1@309.2,881.74 ; v1@311.4,884.04 cw(c287.4,860.04) 321.34,860.04
  Top Layer w40: J2.5@-969.85,-930.21 J4.5@-969.85,-1092.21 -803.57,-1258.5 -650.5,-1258.5 -516.66,-1392.34 -29.34,-1392.34 13,-1350 13,-1149.93 61.71,-1101.21 ; IC2.1@-906.59,-624.21 IC2.1@-827.85,-624.21 ; IC2.1@-906.59,-545.35 IC2.1@-906.59,-545.47 IC2.1@-827.85,-545.47 IC2.1@-827.85,-624.21 ; USB1.1@-885.78,1121.79 USB1.1@-882.86,1121.79 -643.36,882.29 D02.A@-522.9,882.29 ; IC2.1@-827.85,-625.21 IC2.1@-827.85,-624.21 ; UCAN.3@-703.85,-804.69 v1(-703.85,-731.21) ; D02.A@-547.59,871.38 ccw(c-573.94,845.03) -573.94,882.29 ccw(c-573.94,919.55) D02.A@-547.59,893.2 ; R10.2@283.82,692.79 321.34,655.27
  Bottom Layer w25: v1@508.93,-430 cw(c534.97,-456.04) 534.97,-419.21 ; v1(509.42,-430.49) 520.69,-419.21 v1@709.15,-419.21 ; v1(709.15,-422.21) v1@908.15,-422.21 ; v1(908.15,-424.21) 1106.15,-424.21 v1(1108.15,-426.21) v1@1294.15,-426.21 ; v1(1294.15,-429.21) v1@1294.15,-426.21 ; v1(2504.15,-428.21) 2503.15,-429.21 v1(2304.15,-429.21) 2304.15,-428.21 v1(2105.15,-428.21) 2104.15,-427.21 v1(1905.15,-427.21) v1(1506.15,-427.21) 1506.15,-426.21 v1@1294.15,-426.21
  Bottom Layer w40: -974.85,-733.14 ccw(c-934.78,-733.14) J1.5@-963.12,-761.48 ; J4.5@-969.85,-1092.21 -950.85,-1111.21 -708.79,-1111.21 -681.05,-1138.95 -681.05,-1140.08 -664.72,-1156.41 ; J2.5@-969.85,-930.21 J1.5@-969.85,-768.21 -974.85,-763.21 -974.85,-692.47 IC2.1@-906.59,-624.21 -895.29,-635.52 -895.29,-652.78 ; J4.5@-963.12,-1085.48 ccw(c-900.98,-1023.34) -900.98,-1111.21 ; -929.92,1097.29 cw(c-882.86,1050.22) USB1.1@-882.86,1116.79 ; v1(-906.85,-18.43) -1050.21,124.93 -1050.21,977 -905.43,1121.79 USB1.1@-882.86,1121.79 -882.86,1118.79 -647.85,883.79 v1@309.15,883.79 ; IC2.1@-906.59,-545.47 v1@-906.59,-18.43 ; IC2.1@-906.37,-623.99 cw(c-933.13,-650.75) -895.29,-650.75 ; -894.93,-653.14 cw(c-866,-624.21) -906.91,-624.21 ccw(c-867.22,-624.71) -895.29,-652.78 ; v1@-708.85,-726.21 -821.85,-726.21 -895.29,-652.78 ; -689.67,-1130.33 cw(c-670.55,-1111.21) C28.2@-697.59,-1111.21 ; -663.59,-1156.41 -607,-1213 -607,-1374 -533,-1448 2720,-1448 2968,-1200 2968,-685 2920.02,-637.02 2526.34,-637.02 v1(2524.15,-639.21) ; C28.2@-697.59,-1111.21 ccw(c-667.81,-1111.21) -688.87,-1132.27 cw(c-667.81,-1111.21) C28.2@-697.59,-1111.21
  other v1: 309.15,881.79
ADC1: IC1.33
ADC2: IC1.34
BEEP: IC1.31 R14.2 R16.1 | length 2070.2
  Top Layer w8: R16.1@-1318.85,242.79 R14.2@-1189.91,242.79 ; R16.1@-1309.43,233.37 cw(c-1286.69,210.62) -1286.69,242.79 cw(c-1286.69,274.95) R16.1@-1309.43,252.21 ; R14.2@-1199.33,233.37 ccw(c-1222.07,210.62) -1222.07,242.79 ccw(c-1222.07,274.95) R14.2@-1199.33,252.21 ; R14.2@-1189.91,256.11 ccw(c-1189.91,293.24) -1163.66,266.98 ; R14.2@-1186.85,243.79 -1128.85,301.79 -972.84,301.79 -900.85,229.8 -900.85,125.79 -924.85,101.79 -1048.85,101.79 -1163.85,-13.21 -1163.85,-344.21 v1(-1062.85,-445.21) ; R14.2@-1176.59,242.79 cw(c-1149.38,242.79) -1168.62,262.02 ; v1(-981.85,-445.21) -775,-445.21 -761.29,-458.92 -735.14,-458.92 -703.59,-427.36 ; v1@-976.33,-450.74 cw(c-963,-464.07) -963,-445.21 cw(c-963,-426.36) v1@-976.33,-439.69 ; IC1.31@-681.38,-437.57 ccw(c-703.58,-456.6) -703.58,-427.36 ; IC1.31@-681.38,-417.15 cw(c-703.58,-398.12) -703.58,-427.36 ; IC1.31@-669.48,-427.36 -703.59,-427.36
  Bottom Layer w8: v1(-1062.85,-445.21) v1(-981.85,-445.21) ; v1@-1057.33,-450.74 cw(c-1044,-464.07) -1044,-445.21 cw(c-1044,-426.36) v1@-1057.33,-439.69 ; v1@-987.38,-450.74 ccw(c-1000.71,-464.07) -1000.71,-445.21 ccw(c-1000.71,-426.36) v1@-987.38,-439.69
BOOT: IC1.3
CAN_RX: IC1.68 UCAN.4 | length 1943.4
  Top Layer w10: UCAN.4@-758.67,-774.29 ccw(c-770.3,-762.66) -753.85,-762.66 ccw(c-737.41,-762.66) UCAN.4@-749.04,-774.29 ; UCAN.4@-753.85,-804.69 -753.85,-715.21 -724.85,-686.21 -672.85,-686.21 -636.92,-650.28 -636.92,-545.28 -592.54,-500.9 -512.54,-500.9 v1(-463.85,-452.21) ; v1@-470.67,-452.21 cw(c-487.11,-452.21) -475.48,-463.84 cw(c-463.85,-475.47) v1@-463.85,-459.02
  Top Layer w12: v1(-198.85,-453.21) -152.85,-407.21 -152.85,443.59 IC1.68@-118.3,478.15 ; v1@-198.85,-447.4 ccw(c-198.85,-433.37) -188.93,-443.29 ccw(c-179.01,-453.21) v1@-193.04,-453.21 ; IC1.68@-131.98,478.15 cw(c-165.02,478.15) -141.66,454.79 cw(c-118.3,431.43) IC1.68@-118.3,464.46
  Bottom Layer w12: v1(-463.85,-452.21) -464.85,-453.21 v1(-198.85,-453.21) ; v1@-459.75,-448.1 ccw(c-447.41,-435.77) -447.41,-453.21 ; v1@-202.96,-457.32 ccw(c-212.88,-467.24) -212.88,-453.21 ccw(c-212.88,-439.18) v1@-202.96,-449.1
CAN_TX: IC1.67 UCAN.1 | length 1889.1
  Top Layer w8: UCAN.1@-603.85,-804.69 -479.33,-804.69 -456.85,-782.21 -456.85,-703.21 -425.85,-672.21 -42.92,-672.21 -8,-637.28 -8,-611.14 -26.48,-592.65 -37.01,-592.65 -86.74,-542.92 -86.74,-532.4 -118.3,-500.84 IC1.67@-118.3,399.41 ; UCAN.1@-598.33,-810.22 cw(c-585,-823.55) -585,-804.69 cw(c-585,-785.84) UCAN.1@-598.33,-799.17 ; IC1.67@-129.39,388.32 cw(c-156.16,361.54) -118.3,361.54 cw(c-80.43,361.54) IC1.67@-107.2,388.32
ERR_LED: IC1.11 LERR.K | length 2407.2
  Top Layer w8: -404.08,974.78 cw(c-357.14,927.83) LERR.K@-357.14,994.22 ; -390.43,988.44 cw(c-357.14,955.15) LERR.K@-357.14,1002.22 ; -376.77,1002.09 cw(c-357.14,982.46) LERR.K@-357.14,1010.22 ; -376.32,1002.54 ccw(c-384,1010.22) LERR.K@-373.14,1010.22 ; LERR.K@-357.14,1021.72 -432.85,946.01 -432.85,628.79 -548,513.64 -548,164.94 -405.85,22.79 -405.85,-440.21 -464.81,-499.17 -464.81,-558.54 -446.33,-577.03 -435.04,-577.03 -386.07,-625.99 -386.07,-637.28 -367.15,-656.21 -71.56,-656.21 IC1.11@-39.56,-624.21 ; IC1.11@-55.24,-624.21 cw(c-93.11,-624.21) -66.33,-650.99 cw(c-39.56,-677.76) IC1.11@-39.56,-639.9
GND: Batt.2 C1.2 C2.2 C3.2 C4.2 C5.2 C6.2 C7.2 C8.2 C9.2 C18.2 C19.2 C20.2 C24.2 C25.1 C26.1 C28.1 COM1.1 COM4.1 IC1.1 IC2.2 IC2.4 IC2.5 J1.4 J2.4 J4.4 J5.3 J7.1 LI1.K LI2.K LI3.K LI4.K LI5.K LI6.K LI7.K LI8.K LI9.K LI10.K LI11.K LI12.K LO1.K LO2.K LO3.K LO4.K LO5.K LO6.K LO7.K LO8.K LO9.K LO10.K LO11.K LO12.K LPOWER.K PAD1.1 PAD2.1 PAD3.1 PAD4.1 Q01.2 R11.2 R14.1 S1.5 S1.6 S1.7 S1.8 S2.2 U232.15 U485.5 UCAN.2 UCAN.8 UOA.9 UOB.9 UOC.9 USB1.4 USB1.5 USB1.6 | length 12037.7
  Top Layer w8: C5.2@-975.22,-174.63 cw(c-997.96,-197.38) -965.8,-197.38 cw(c-933.64,-197.38) C5.2@-956.38,-174.63 ; C6.2@-975.1,-249.63 cw(c-997.57,-272.1) -965.8,-272.1 ; C6.2@-975.1,-230.79 ccw(c-997.57,-208.33) -965.8,-208.33 ; C8.2@-973.22,-317.79 ccw(c-991.13,-299.88) -965.8,-299.88 ; v1(-969,-28) C4.2@-967.92,-28 ; -965.8,-377.76 cw(c-994.74,-377.76) -974.27,-398.22 ccw(c-997.02,-375.48) -964.85,-375.48 ccw(c-932.69,-375.48) -955.43,-398.22 cw(c-930.41,-373.2) -965.8,-373.2 ; -965.8,-344.89 cw(c-946.12,-344.89) C8.2@-960.04,-330.98 ; -965.8,-309.53 ccw(c-946.12,-309.53) C8.2@-960.04,-323.45 ; -965.8,-290.22 ccw(c-926.81,-290.22) C8.2@-954.38,-317.79 ; -965.8,-272.66 cw(c-933.24,-272.66) C6.2@-956.26,-249.63 ; -965.8,-207.77 ccw(c-933.24,-207.77) C6.2@-956.26,-230.79 ; C5.2@-965.8,-165.21 -965.8,-406.7 C9.2@-964.85,-407.64 -964.85,-375.21 v1(-952.85,-363.21) ; UCAN.2@-654.04,-779.1 cw(c-635.45,-779.1) -648.6,-765.96 ; UCAN.2@-653.85,-804.69 -653.85,-771.21 v1(-628.85,-746.21) ; UCAN.2@-646.04,-779.1 cw(c-608.14,-779.1) v1@-634.94,-752.3 ; -642.9,-766.09 cw(c-619.98,-779.32) v1@-626.83,-753.76 ; -637.52,-756.77 ccw(c-647.27,-751.15) v1@-636.4,-748.23 ; v1@-636.67,-746.21 cw(c-655.52,-746.21) -642.19,-759.55 cw(c-628.85,-772.88) v1@-628.85,-754.02 ; UCAN.8@-603.85,-989.73 v1@-576.37,-1017.21 ; v1@-572.85,-1015.21 v1(-572.85,-939.21) ; U232.15@34.08,-991.8 ccw(c29.15,-986.87) 36.12,-986.87 ccw(c43.1,-986.87) U232.15@38.17,-991.8 ; U232.15@36.12,-1020.42 36.12,-975.24 ; U232.15@36.12,-1006.85 cw(c85.79,-1006.85) v1@50.67,-971.74 ; U232.15@36.12,-987.54 cw(c66.47,-987.54) v1@45.01,-966.08 ; v1@37.71,-968.62 cw(c31.51,-970.63) 36.12,-975.24 ; v1@42.74,-973.64 ccw(c40.73,-979.84) 36.12,-975.24 ; v1(45.15,-966.21) 36.12,-975.24 ; C20.2@237.67,-1044.79 ccw(c214.79,-1021.92) v1@247.15,-1021.92 ; v1@240.79,-1020.75 cw(c226.35,-1031.03) 243.47,-1035.62 ; v1@241.62,-1021.74 cw(c228.29,-1035.07) 247.15,-1035.07 cw(c266,-1035.07) v1@252.67,-1021.74 ; v1@243.24,-1022.98 cw(c236.45,-1034.74) 249.57,-1031.22 ; 244.61,-1031.37 cw(c257.96,-1034.94) v1@251.05,-1022.98 ; C20.2@247.09,-1054.21 C20.2@247.09,-1054.21 v1(247.15,-1016.21) 252.58,-1016.21 296.58,-972.21 C24.2@304.2,-972.21 ; v1@247.15,-1022.18 ccw(c279.12,-1022.18) C20.2@256.51,-1044.79 ; v1@247.15,-1008.4 ccw(c247.15,-976.42) 269.76,-999.03 ; 250.74,-1035.58 cw(c267.62,-1031.06) v1@253.47,-1020.8 ; 268.45,-1000.34 cw(c304.2,-1036.09) C24.2@304.2,-985.54 ; 282.11,-986.69 cw(c304.2,-1008.77) C24.2@304.2,-977.54 ; 286.84,-981.95 ccw(c277.1,-972.21) C24.2@290.88,-972.21 ; LO1.K@498.05,-1081.74 ccw(c471.28,-1054.96) 509.15,-1054.96 ccw(c547.01,-1054.96) LO1.K@520.24,-1081.74 ; v1@502.4,-1050.16 cw(c479.86,-1063.34) 505.09,-1070.1 ; v1@503.62,-1051.74 cw(c490.29,-1065.07) 509.15,-1065.07 cw(c528,-1065.07) v1@514.67,-1051.74 ; v1@505.24,-1052.98 cw(c499.68,-1062.61) 510.43,-1059.73 ; 507.87,-1059.73 cw(c518.62,-1062.61) v1@513.05,-1052.98 ; LO1.K@509.15,-1092.83 v1(509.15,-1046.21) ; 513.2,-1070.1 cw(c538.43,-1063.34) v1@515.89,-1050.16
  Top Layer w12: R14.1@-1130.85,242.79 -1093.85,279.79 -1002.28,279.79 C1.2@-964.85,242.36 C2.2@-964.85,150.07 -964.14,150.79 v1(-926.85,150.79) ; R14.1@-1130.85,254.11 ccw(c-1130.85,281.45) -1111.52,262.12 ccw(c-1092.2,242.79) R14.1@-1119.53,242.79 ; C1.2@-976.18,242.36 ccw(c-1003.51,242.36) -984.18,261.69 ccw(c-964.85,281.02) C1.2@-964.85,253.68 ; C2.2@-972.86,158.08 ccw(c-992.19,177.41) -964.85,177.41 ccw(c-937.52,177.41) -956.85,158.08 ccw(c-939.24,175.68) -939.24,150.79 ; C1.2@-972.86,234.35 cw(c-992.19,215.02) -964.85,215.02 cw(c-937.52,215.02) C1.2@-956.85,234.35 ; C4.2@-964.85,-31.07 -946.58,-49.34 -884.34,-49.34 -850,-15 -850,40.12 v1@-888.85,78.98 ; C3.2@-964.85,57.79 -915.85,57.79 v1(-888.85,84.79) ; C3.2@-956.85,49.78 cw(c-937.52,30.45) -937.52,57.79 cw(c-937.52,85.12) C3.2@-956.85,65.79 ; C2.2@-956.85,142.07 cw(c-935.79,121.01) v1@-935.79,150.79 ; -946.4,147.95 cw(c-940.72,126.76) v1@-929.76,145.75 ; v1@-930.96,146.68 ccw(c-940.88,136.76) -940.88,150.79 ccw(c-940.88,164.82) v1@-930.96,154.9 ; v1@-64.96,573.9 ccw(c-74.88,583.82) -60.85,583.82 ccw(c-46.83,583.82) v1@-56.75,573.9 ; U485.5@-64.96,602.57 cw(c-74.88,592.65) -60.85,592.65 cw(c-46.83,592.65) U485.5@-56.75,602.57 ; v1(-60.85,569.79) U485.5@-60.85,632.27 ; Batt.2@160.32,-66.49 cw(c86.55,-140.25) 190.87,-140.25 cw(c295.19,-140.25) Batt.2@221.43,-66.49 ; Batt.2@168.8,-58 cw(c115.52,-111.28) 190.87,-111.28 cw(c266.22,-111.28) Batt.2@212.94,-58 ; Batt.2@180,-5.37 ccw(c51.69,122.93) 233.15,122.93 ; v1@180.15,582.6 ccw(c180.15,596.63) 190.07,586.71 ccw(c199.99,576.79) v1@185.96,576.79 ; v1@181.65,582.4 ccw(c185.28,595.95) 192.29,583.8 ccw(c199.31,571.65) v1@185.76,575.28 ; Batt.2@188.49,-13.86 ccw(c80.67,93.96) 233.15,93.96 ; Batt.2@196.97,-22.34 ccw(c109.64,64.99) 233.15,64.99 ; 199.96,596.6 cw(c221.38,575.18) R11.2@222.11,605.46 ; Batt.2@205.46,-30.83 ccw(c138.61,36.02) 233.15,36.02 ; C25.1@221.15,869.79 225.93,869.79 263.62,907.47 294.1,907.47 420.15,1033.52 v1@420.15,1130.79 ; C25.1@221.15,881.11 ccw(c221.15,920.01) 248.65,892.5 ; R11.2@221.82,593.47 ccw(c220.45,536.49) v1(180.15,576.79) 208.15,604.79 R11.2@222.09,604.79 ; v1@229.04,440.68 cw(c219.12,430.76) 233.15,430.76 cw(c247.17,430.76) v1@237.25,440.68 ; C25.1@232.47,869.79 cw(c248.24,869.79) C25.1@237.09,880.94 ; 233.15,13.86 ccw(c260.34,13.86) Batt.2@241.11,-5.37 ; v1(233.15,444.79) 233.15,6.35 Batt.2@190.87,-35.93 190.87,-457.24 241.85,-508.21 241.85,-559.37 267.69,-585.21 315.15,-585.21 IC1.1@354.15,-624.21 ; IC1.1@340.46,-624.21 ccw(c307.42,-624.21) 330.78,-600.85 ccw(c354.15,-577.49) IC1.1@354.15,-610.53 ; v1@357.04,598.9 ccw(c335.05,620.89) 366.15,620.89 ; v1(361.15,594.79) 366.15,594.79 366.15,979.52 ; v1@416.04,1127.68 cw(c406.12,1117.76) 420.15,1117.76 cw(c434.17,1117.76) v1@424.25,1127.68 ; v1@487.15,1198.98 cw(c487.15,1173.78) 504.96,1191.6 ; v1(487.15,1204.79) 491.77,1204.79 514.15,1182.41 LI1.K@514.15,1118.4 ; LI1.K@504.47,1128.08 ccw(c481.11,1151.44) 514.15,1151.44 ccw(c547.18,1151.44) LI1.K@523.82,1128.08 ; UOA.9@934.89,-212.47 ccw(c924.97,-202.55) 939,-202.55 ccw(c953.03,-202.55) UOA.9@943.11,-212.47 ; v1@934.89,-135.11 cw(c924.97,-145.03) 939,-145.03 cw(c953.03,-145.03) v1@943.11,-135.11 ; UOA.9@939,-244.13 v1(939,-131) ; v1@1459.89,-132.11 cw(c1449.97,-142.03) 1464,-142.03 cw(c1478.03,-142.03) v1@1468.11,-132.11 ; UOB.9@1460.04,-212.47 ccw(c1450.47,-202.9) 1464,-202.9 ; v1@1461,-128 v1(1464,-128) UOB.9@1464,-243.99 ; 1464,-202.19 ccw(c1478.53,-202.19) UOB.9@1468.25,-212.47 ; UOB.9@1464.15,-217.11 1502.25,-179 1502.25,130.06 1607.2,235 v1(1972,235) ; UOB.9@1464.15,-210.76 ccw(c1464.15,-195.45) 1474.97,-206.28 ; UOB.9@1469.96,-216.57 cw(c1482.7,-216.57) 1473.69,-207.56 ; v1(1835,-127) 1916.32,-127 1948.69,-159.36 1948.69,-218.68 UOC.9@1973,-243 2011.13,-281.13 ; v1@1839.11,-131.11 cw(c1849.03,-141.03) 1849.03,-127 cw(c1849.03,-112.97) v1@1839.11,-122.89 ; UOC.9@1964.57,-254.44 cw(c1973.86,-272.2) 1988.03,-258.03 ; v1@1967.89,230.89 ccw(c1957.97,220.97) 1957.97,235 ccw(c1957.97,249.03) v1@1967.89,239.11 ; UOC.9@1970.13,-265.08 cw(c1981.79,-287.36) 1999.58,-269.58 ; UOC.9@1975.69,-275.71 cw(c1989.72,-302.53) 2011.13,-281.13 ; 2143.18,-281.13 ccw(c2143.18,-246.18) v1@2167.89,-270.89 ; v1(2172,-275) 2165.87,-281.13 2011.13,-281.13
  Bottom Layer w8: IC2.2@-985.33,-545.47 -952.85,-512.99 v1(-952.85,-363.21) -952.85,-44.15 v1(-969,-28) ; IC2.2@-985.33,-529.79 ccw(c-985.33,-491.92) -958.56,-518.7 ccw(c-931.78,-545.47) IC2.2@-969.65,-545.47 ; C28.1@-635.85,-1111.21 -572.85,-1048.21 v1@-572.85,-1019.21 ; C28.1@-635.85,-1097.89 ccw(c-635.85,-1065.73) -613.11,-1088.47 ccw(c-590.37,-1111.21) C28.1@-622.53,-1111.21 ; v1(-628.85,-746.21) -597.85,-746.21 -523,-821.07 -523,-885.36 v1@-574.85,-937.21 ; v1@-623.33,-751.74 cw(c-610,-765.07) -610,-746.21 cw(c-610,-727.36) v1@-623.33,-740.69 ; v1@45.15,-965.21 196.15,-965.21 v1(247.15,-1016.21) 479.15,-1016.21 v1(509.15,-1046.21) ; v1@50.67,-971.74 cw(c66.42,-987.48) 66.42,-965.21 ; v1@50.67,-960.69 ccw(c61.59,-949.77) 61.59,-965.21 ; v1@239.33,-1016.21 ccw(c220.48,-1016.21) 233.81,-1002.88 ccw(c247.15,-989.54) v1@247.15,-1008.4 ; v1@252.67,-1021.74 cw(c266,-1035.07) 266,-1016.21 cw(c266,-997.36) v1@252.67,-1010.69 ; v1@501.33,-1046.21 ccw(c482.48,-1046.21) 495.81,-1032.88 ccw(c509.15,-1019.54) v1@509.15,-1038.4
  Bottom Layer w12: v1@-926.85,144.98 cw(c-926.85,104.39) -898.16,133.09 ; v1(-926.85,150.79) -915.85,150.79 -888.85,123.79 v1(-888.85,84.79) ; v1@-892.96,88.9 ccw(c-902.88,98.82) -888.85,98.82 ccw(c-874.83,98.82) v1@-884.75,88.9 ; v1@-60.85,563.98 cw(c-60.85,549.95) -50.93,559.87 cw(c-41.01,569.79) v1@-55.04,569.79 ; v1(-60.85,569.79) -23.85,532.79 136.15,532.79 v1(180.15,576.79) ; v1@174.33,576.79 cw(c160.31,576.79) 170.23,566.87 cw(c180.15,556.95) 180.15,570.98 cw(c180.15,556.95) 190.07,566.87 cw(c199.99,576.79) v1@185.96,576.79 ; v1@184.25,572.68 cw(c194.17,562.76) 194.17,576.79 cw(c194.17,590.82) v1@184.25,580.9 ; v1@229.04,448.9 ccw(c219.12,458.82) 233.15,458.82 ccw(c247.17,458.82) v1@237.25,448.9 ; v1(233.15,444.79) 233.15,523.79 v1(180.15,576.79) ; v1@357.04,590.68 ccw(c347.12,580.76) 347.12,594.79 ccw(c347.12,608.82) v1@357.04,598.9 ; v1(361.15,594.79) 293.39,594.79 275.39,576.79 v1(180.15,576.79) ; v1@416.04,1135.9 ccw(c406.12,1145.82) 420.15,1145.82 ccw(c434.17,1145.82) v1@424.25,1135.9 ; v1(420.15,1131.79) 420.15,1175.79 449.15,1204.79 v1(487.15,1204.79) ; v1@483.04,1200.68 ccw(c473.12,1190.76) 473.12,1204.79 ccw(c473.12,1218.82) v1@483.04,1208.9 ; v1@934.89,-126.89 ccw(c924.97,-116.97) 939,-116.97 ccw(c953.03,-116.97) v1@943.11,-126.89 ; v1(939,-131) 939,-86 1013,-12 1363,-12 1464,-113 v1(1464,-128) 1465,-127 v1(1835,-127) ; 1443.47,-92.47 cw(c1407.95,-128) v1@1458.19,-128 ; v1@1459.89,-123.89 ccw(c1449.97,-113.97) 1464,-113.97 ccw(c1478.03,-113.97) v1@1468.11,-123.89 ; 1463.96,-112.96 cw(c1448.92,-128) v1@1470.19,-128 ; v1@1468.11,-132.11 cw(c1480.44,-144.44) 1480.44,-127 ; v1@1830.89,-131.11 ccw(c1820.97,-141.03) 1820.97,-127 ccw(c1820.97,-112.97) v1@1830.89,-122.89 ; v1(1972,235) 2154.94,235 ; v1@1976.11,230.89 cw(c1986.03,220.97) 1986.03,235 cw(c1986.03,249.03) v1@1976.11,239.11 ; J7.1@2162.74,208.21 ccw(c2134.43,214.49) 2154.94,235 ; v1@2170.5,-269.39 ccw(c2164.39,-246.59) C26.1@2184.82,-258.39 ; v1(2172,-275) 2200.15,-246.85 C26.1@2200.15,-245.21 ; v1@2172,-269.19 ccw(c2172,-255.16) 2181.92,-265.08 ccw(c2191.84,-275) v1@2177.81,-275 ; v1@2177.36,-277.25 cw(c2210.68,-291.28) C26.1@2197.04,-257.8 ; v1@2179.66,-267.34 ccw(c2157.52,-245.21) C26.1@2188.82,-245.21 ; J7.1@2181.73,227.19 cw(c2175.44,255.5) 2154.94,235 ; 2183.62,-263.38 cw(c2200.15,-279.91) C26.1@2200.15,-256.54 ; J7.1@2187.15,202.79 2154.94,235
  other v1: -574.85,-1017.21